# Altium PCB Synthesizer Build part-24 ADSR with 7555_TC_V1.PcbDoc
Units mm, origin at the board's own origin, x right, y up, seen from the top; angles counter-clockwise.
Board outline 118.36 x 72.39 mm, 2 copper layers (Top Layer, Bottom Layer), stack 1.681 mm thick; 56 components, 40 nets, 160 pads, 7 vias.
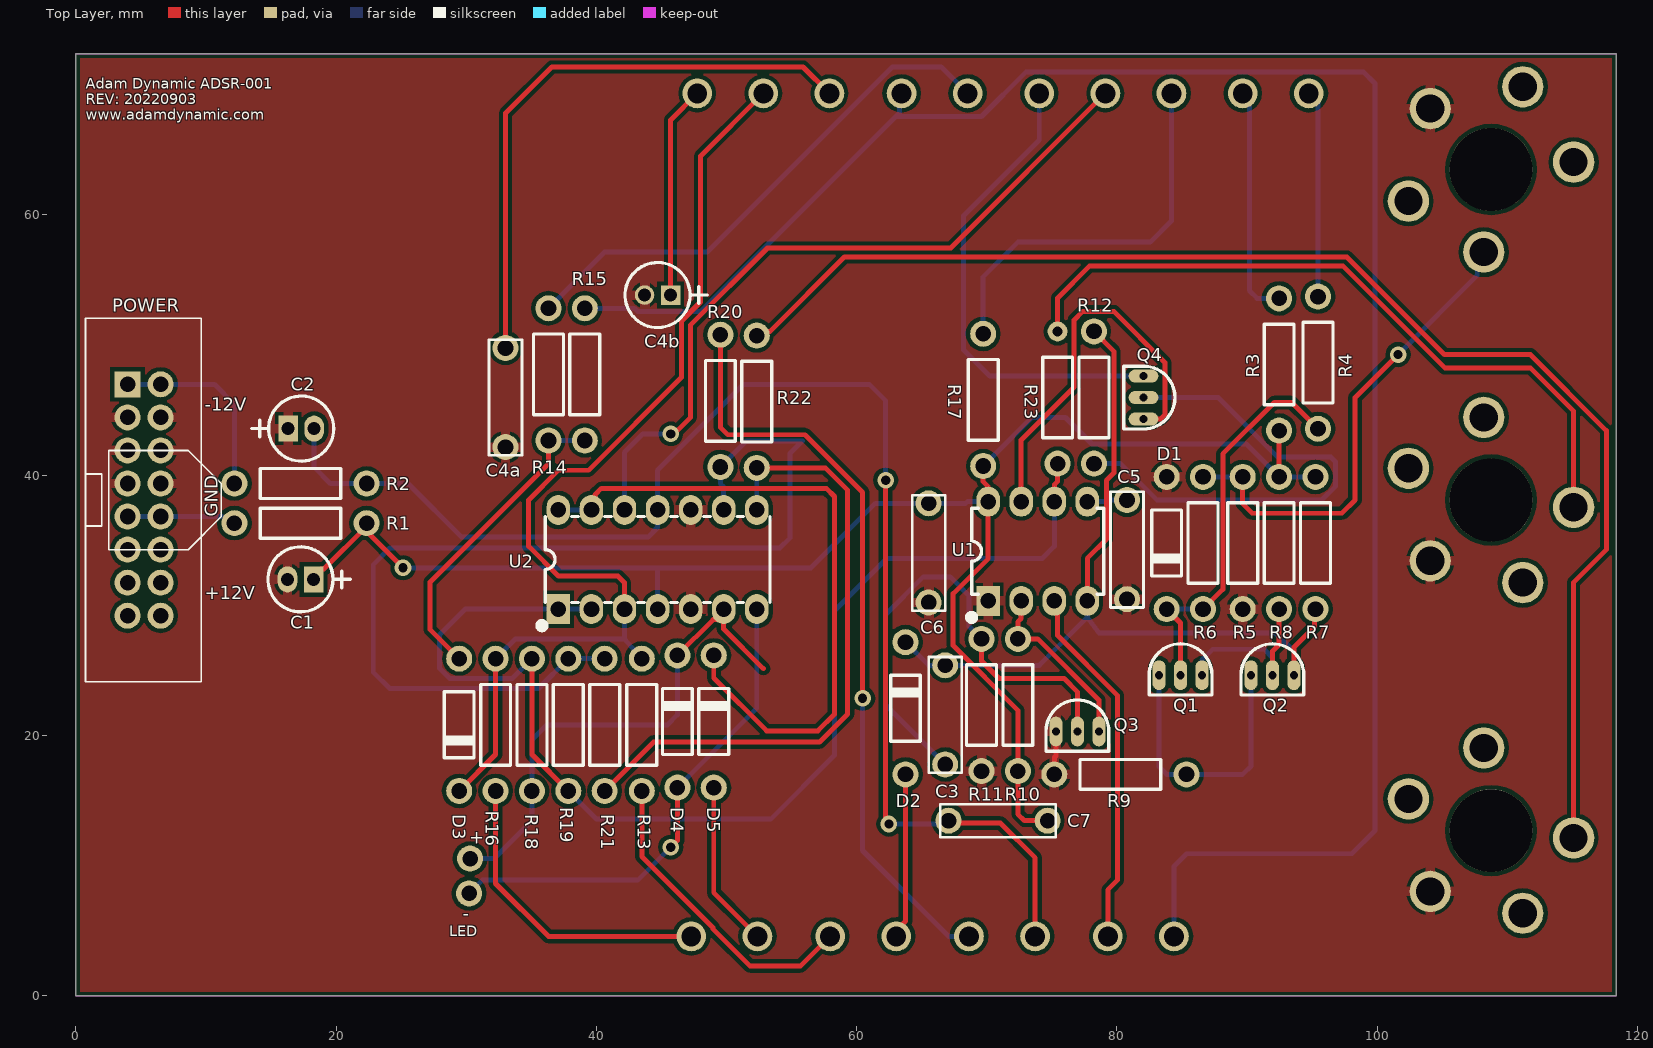
[diagram p0: Top Layer view]
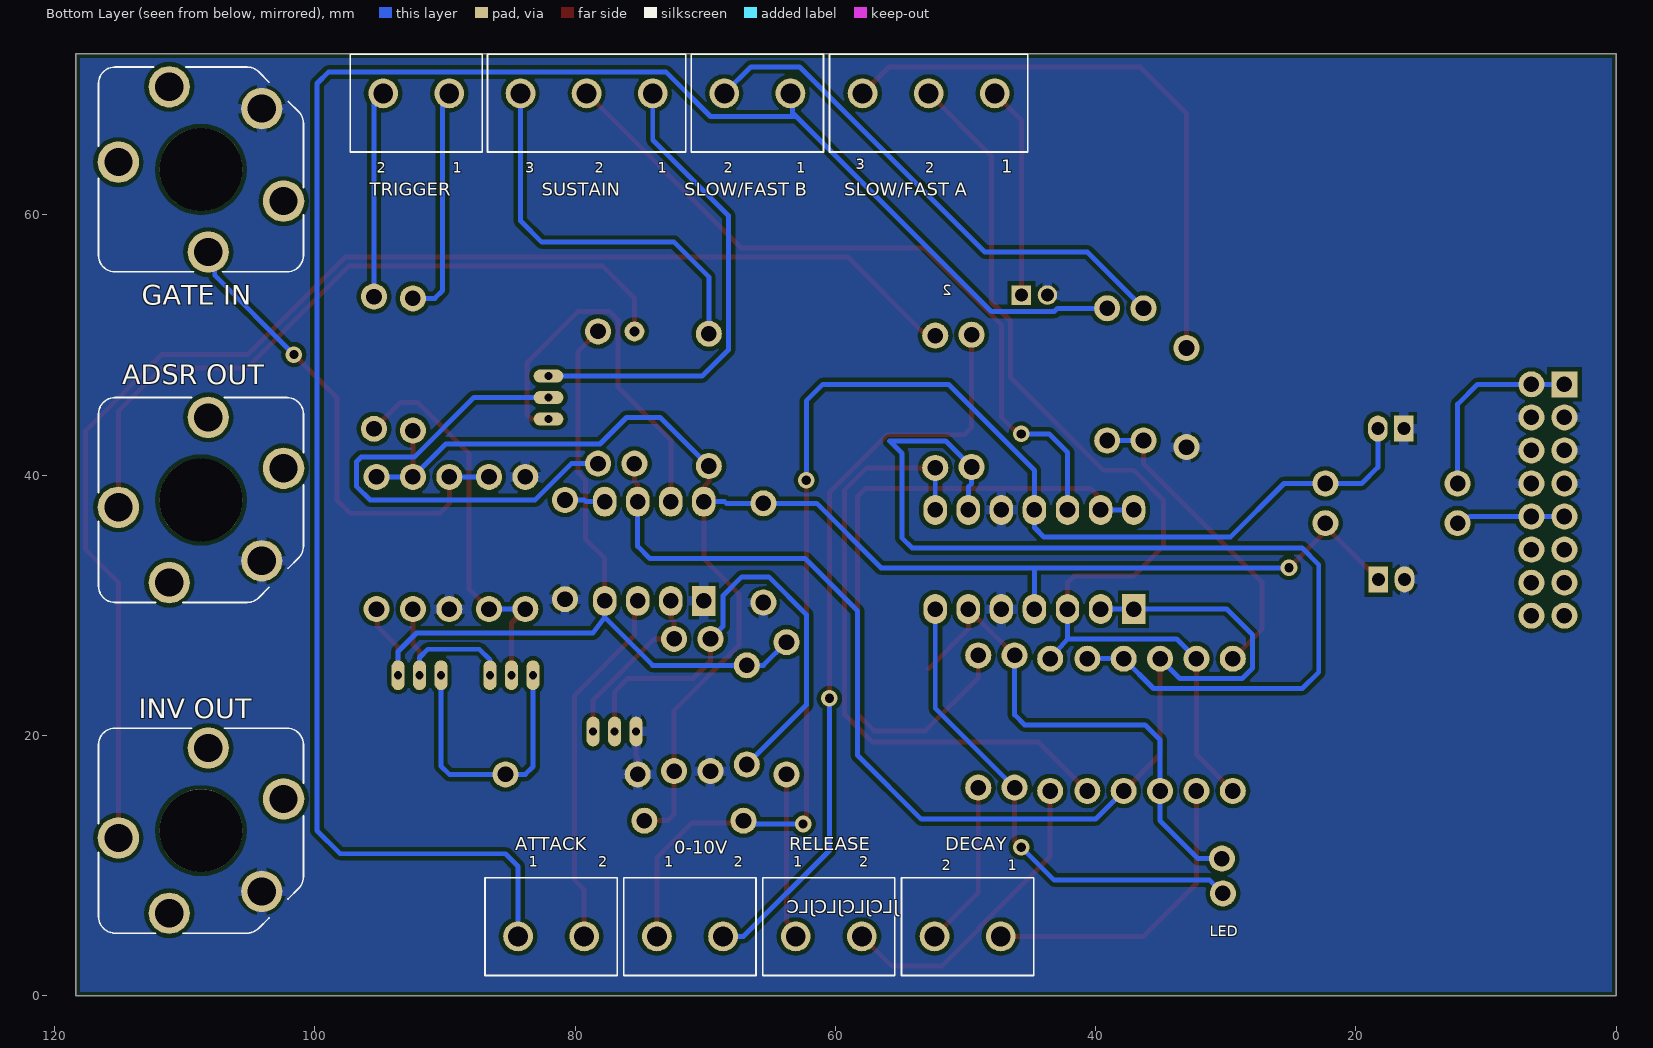
[diagram p1: Bottom Layer view, seen from below]
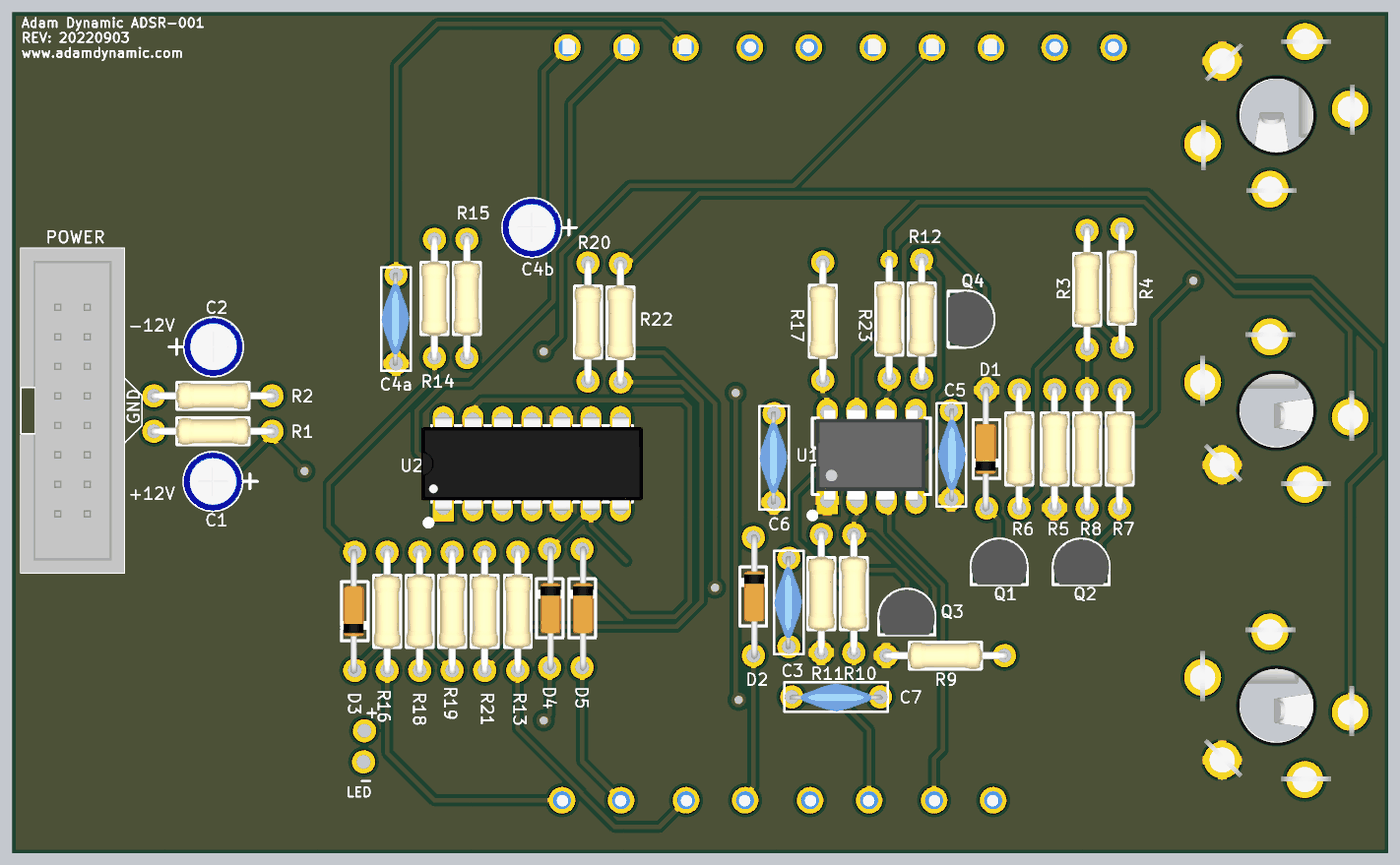
[diagram p2: 3D render of the assembled board from above, using the file's embedded part models]
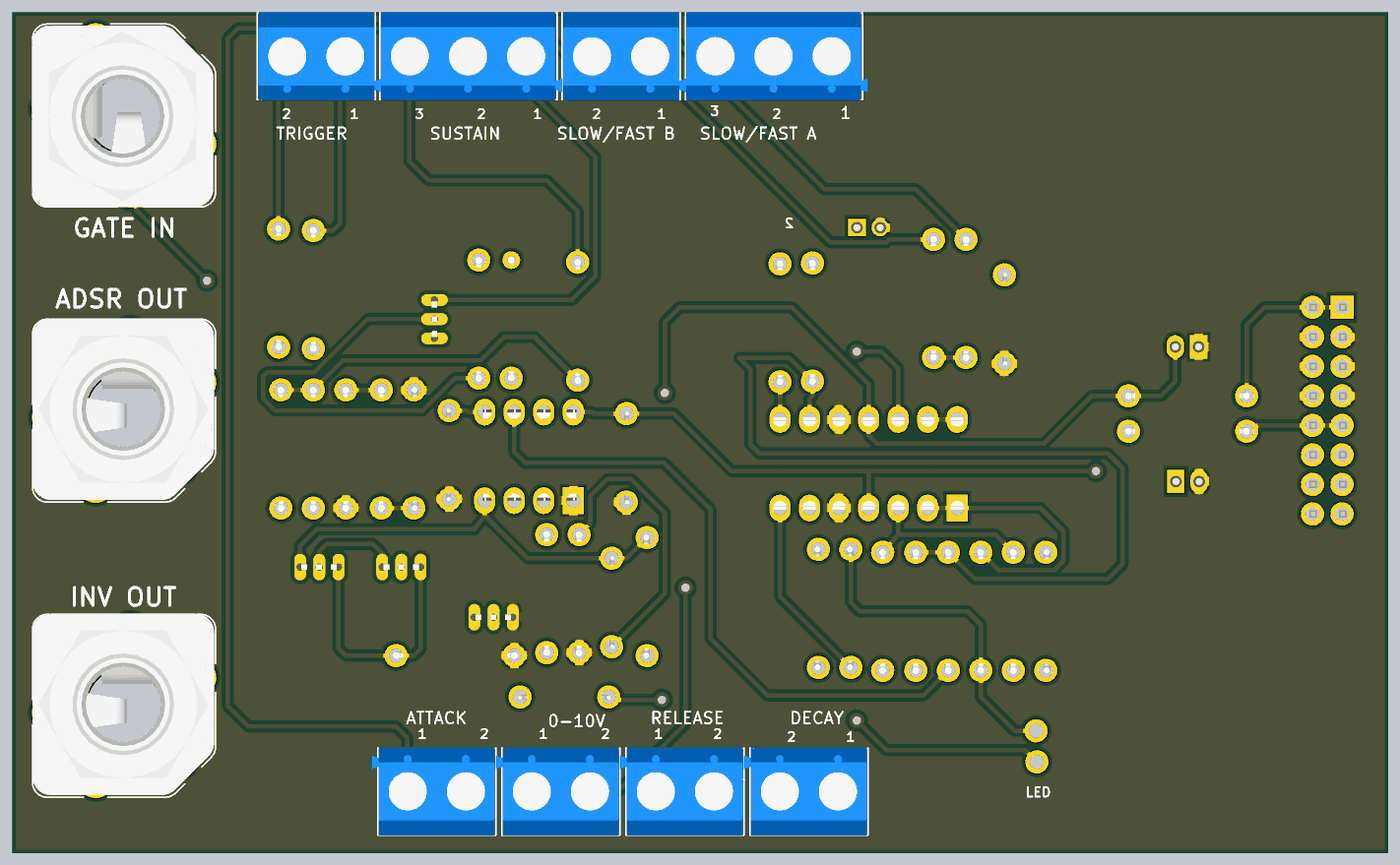
[diagram p3: 3D render of the assembled board from below, using the file's embedded part models]

## Layer stack, top to bottom
Top Solder: solder mask 0.0102, Solder Resist, Dk 3.5
Top Layer: signal copper 0.0356
Dielectric1: dielectric 1.6104, FR-4, Dk 4.8
Bottom Layer: signal copper 0.0356
Bottom Solder: solder mask 0.0102, Solder Resist, Dk 3.5

## Board outline
0,0 118.364,0 118.364,72.39 0,72.39

## Design rules (kind name [scope] priority, off if disabled: settings)
Clearance Clearance_1 [InPadClass('mount') vs InNamedPolygon('GND_L02_P002')or InNamedPolygon('GND_L01_P000')] p1: gap=1.27 ignorepadtopadclearanceinfootprint=FALSE except(0: Arc-Hole Track-Hole SMDPad-Hole THPad-Hole Via-Hole Fill-Hole Poly-Hole Region-Hole Text-Hole)
Clearance [All] p2: gap=0.318 ignorepadtopadclearanceinfootprint=FALSE except(0: Arc-Hole Track-Hole SMDPad-Hole THPad-Hole Via-Hole Fill-Hole Poly-Hole Region-Hole Text-Hole)
PolygonConnect PolygonConnect_1 [HasFootprint('HEADER 8X2')] p1: connectstyle=Relief reliefconductorwidth=0.762 reliefentries=4 polygonreliefangle="90 Angle" airgapwidth=0.254
PolygonConnect [All] p2: connectstyle=Relief reliefconductorwidth=0.762 reliefentries=4 polygonreliefangle="90 Angle" airgapwidth=0.254
RoutingVias [All] p1: holewidth=0.711 width=1.27 viastyle="Through Hole" minholewidth=0.711 minwidth=1.27 maxholewidth=0.711 maxwidth=1.27
SolderMaskExpansion [All] p1: expansion=0.102
Width [All] p1: maxlimit=1.27 minlimit=0.254 preferedwidth=0.381
30 further rules are at their usual default settings.

## Components (designator, comment, footprint, x,y, rotation, side; value= is the part's Value field where it differs from the comment)
0-10V "SCREW TERMINAL 2WAY" "SCREW TERMINAL 2WAY" 71.172,4.572 r180 bottom
+ "Hole" LED_HOle 30.3,10.55 r0 top
- "Hole" LED_HOle 30.226,7.874 r0 top
"ADSR OUT" "N114BPCX" SWITCHCRAFT_N114BPCX 108.74,38.1 r180 bottom locked
ATTACK "SCREW TERMINAL 2WAY" "SCREW TERMINAL 2WAY" 81.84,4.572 r180 bottom
C1 "22uF" "CAP 5X11"#1 17.272,32.004 r180 top
C2 "22uF" "CAP 5X11"#1 17.321,43.588 r0 top
C3 "10nF" "CAP RAD-0.3" 66.802,21.59 r270 top
C4a "1uF" "CAP RAD-0.3" 33.02,45.974 r270 top
C4b "10uF" "CAP 5X11"#2 44.704,53.848 r180 top
C5 "10nF" "CAP RAD-0.3" 80.772,34.29 r90 top
C6 "100nF" "CAP RAD-0.3" 65.532,34.036 r270 top
C7 "100nF" "CAP RAD-0.3" 70.866,13.462 r0 top
D1 "DIODE 1N4148" DO-35 83.82,34.798 r270 top
D2 "DIODE 1N4148" DO-35 63.754,22.098 r90 top
D3 "DIODE 1N4148" DO-35 29.464,20.828 r270 top
D4 "DIODE 1N4148" DO-35 49.022,21.082 r90 top
D5 "DIODE 1N4148" DO-35 46.228,21.082 r90 top
DECAY "SCREW TERMINAL 2WAY" "SCREW TERMINAL 2WAY" 49.836,4.572 r180 bottom
"GATE IN" "N114BPCX" SWITCHCRAFT_N114BPCX 108.74,63.5 r90 bottom locked
"INV OUT" "N114BPCX" SWITCHCRAFT_N114BPCX 108.74,12.7 r180 bottom locked
POWER "HEADER 8X2" "HEADER 8X2" 5.254,38.1 r270 top locked
Q1 "BC547" TO92 84.884,24.641 r0 top
Q2 "BC547" TO92 91.948,24.638 r0 top
Q3 "BC547" TO92 76.962,20.32 r0 top
Q4 "BS170" TO92 82.042,45.974 r270 top
R1 "10R" "RES 6.2 x 0.5 x 2.3"#1 17.272,36.322 r180 top
R2 "10R" "RES 6.2 x 0.5 x 2.3"#1 17.272,39.37 r180 top
R3 "10K" "RES 6.2 x 0.5 x 2.3"#1 92.456,48.514 r270 top
R4 "47K" "RES 6.2 x 0.5 x 2.3"#1 95.446,48.651 r270 top
R5 "1M2" "RES 6.2 x 0.5 x 2.3"#1 89.662,34.798 r90 top
R6 "1M" "RES 6.2 x 0.5 x 2.3"#1 86.614,34.798 r90 top
R7 "22K" "RES 6.2 x 0.5 x 2.3"#1 92.456,34.798 r90 top
R8 "22K" "RES 6.2 x 0.5 x 2.3"#1 95.25,34.798 r90 top
R9 "10R" "RES 6.2 x 0.5 x 2.3"#1 80.264,17.018 r0 top
R10 "22K" "RES 6.2 x 0.5 x 2.3"#1 69.596,22.352 r90 top
R11 "22K" "RES 6.2 x 0.5 x 2.3"#1 72.39,22.352 r270 top
R12 "1M" "RES 6.2 x 0.5 x 2.3"#1 78.232,45.974 r90 top
R13 "100R" "RES 6.2 x 0.5 x 2.3"#1 43.493,20.828 r90 top
R14 "120R" "RES 6.2 x 0.5 x 2.3"#1 36.322,47.752 r90 top
R15 "680R" "RES 6.2 x 0.5 x 2.3"#1 39.116,47.752 r270 top
R16 "100R" "RES 6.2 x 0.5 x 2.3"#1 32.258,20.828 r90 top
R17 "4K7" "RES 6.2 x 0.5 x 2.3"#1 69.723,45.791 r90 top
R18 "1K" "RES 6.2 x 0.5 x 2.3"#1 35.052,20.828 r90 top
R19 "100K" "RES 6.2 x 0.5 x 2.3"#1 37.846,20.828 r90 top
R20 "150K" "RES 6.2 x 0.5 x 2.3"#1 49.53,45.72 r90 top
R21 "100K" "RES 6.2 x 0.5 x 2.3"#1 40.64,20.828 r90 top
R22 "1K" "RES 6.2 x 0.5 x 2.3"#1 52.324,45.652 r270 top
R23 "1K" "RES 6.2 x 0.5 x 2.3"#2 75.438,45.974 r270 top
RELEASE "SCREW TERMINAL 2WAY" "SCREW TERMINAL 2WAY" 60.504,4.572 r180 bottom
"SLOW/FAST A" "SCREW TERMINAL 3WAY" "SCREW TERMINAL 3WAY" 52.832,69.342 r0 bottom
"SLOW/FAST B" "SCREW TERMINAL 2WAY" "SCREW TERMINAL 2WAY" 65.988,69.342 r0 bottom
SUSTAIN "SCREW TERMINAL 3WAY" "SCREW TERMINAL 3WAY" 79.111,69.342 r0 bottom
TRIGGER "SCREW TERMINAL 2WAY" "SCREW TERMINAL 2WAY" 92.202,69.342 r0 bottom
U1 "ICM7555" "DIP 8 PIN" 73.914,34.163 r0 top
U2 "TL074" "DIP 14 PIN" 45.974,33.528 r0 top

## Footprints (in the part's own frame and the unit in brackets; to place one, negate y for a bottom-side part, rotate by r counter-clockwise, add the part's x,y. Pads: shape width x height; smd on the part's side, far side on the other; paste and mask are expansions set on the pad)
"CAP 5X11"#1 [mm]
  rect 1.5x2 hole 1: 1(-1,0)
  oval 1.5x2 hole 1: 2(1,0)
  silkscreen extent -3.81,-2.5 2.5,2.5, body extent -2.53,-2.53 2.53,2.53, height 11.53
"CAP 5X11"#2 [mm]
  rect 1.5x1.5 hole 1: 1(-1,0)
  round 1.5 hole 1: 2(1,0)
  silkscreen extent -3.81,-2.5 2.5,2.5, body extent -2.53,-2.53 2.53,2.53, height 11.53
"CAP RAD-0.3" [mm]
  round 2 hole 1.2: 1(-3.81,0) 2(3.81,0)
  silkscreen extent -4.44,-1.27 4.45,1.27, body extent -4,-1.25 4,1.14, height 11.03
"DIP 8 PIN" [mm]
  rect 1.8x2.3 hole 1.2: 1(-3.81,-3.81)
  oval 1.8x2.3 hole 1.2: 2(-1.27,-3.81) 3(1.27,-3.81) 4(3.81,-3.81) 5(3.81,3.81) 6(1.27,3.81) 7(-1.27,3.81) 8(-3.81,3.81)
  silkscreen extent -5.33,-5.33 5.08,3.3, body extent -4.76,-3.81 4.64,4.06, height 4.36
"DIP 14 PIN" [mm]
  rect 1.8x2.3 hole 1.2: 1(-8.89,-3.81)
  oval 1.8x2.3 hole 1.2: 2(-6.35,-3.81) 3(-3.81,-3.81) 4(-1.27,-3.81) 5(1.27,-3.81) 6(3.81,-3.81) 7(6.35,-3.81) 8(6.35,3.81) 9(3.81,3.81) 10(1.27,3.81) 11(-1.27,3.81) 12(-3.81,3.81) 13(-6.35,3.81) 14(-8.89,3.81)
  silkscreen extent -10.41,-5.33 7.37,3.3, body extent -10.77,-4 8.28,4, height 4.11
DO-35 [mm]
  round 2 hole 1.2: 1(-5.08,0) 2(5.08,0)
  silkscreen extent -2.54,-1.14 2.54,1.14, body extent -5.35,-0.95 5.35,0.8, height 2.15
"HEADER 8X2" [mm]
  rect 2x2 hole 1.2: 1(-8.89,-1.27)
  round 2 hole 1.2: 2(-8.89,1.27) 3(-6.35,-1.27) 4(-6.35,1.27) 5(-3.81,-1.27) 6(-3.81,1.27) 7(-1.27,-1.27) 8(-1.27,1.27) 9(1.27,-1.27) 10(1.27,1.27) 11(3.81,-1.27) 12(3.81,1.27) 13(6.35,-1.27) 14(6.35,1.27) 15(8.89,-1.27) 16(8.89,1.27)
  silkscreen extent -13.97,-4.5 13.97,4.39, body extent -13.97,-4.5 13.97,4.39, height 8.56
LED_HOle [mm]
  round 2 hole 1.2: 1(0,0)
"RES 6.2 x 0.5 x 2.3"#1 [mm]
  round 2 hole 1.2: 1(-5.08,0) 2(5.08,0)
  silkscreen extent -3.1,-1.15 3.1,1.15, body extent -5.4,-1.15 5.36,1.15, height 2.43
"RES 6.2 x 0.5 x 2.3"#2 [mm]
  round 1.524 hole 0.762: 1(-5.08,0)
  round 2 hole 1.2: 2(5.08,0)
  silkscreen extent -3.1,-1.15 3.1,1.15, body extent -5.4,-1.15 5.36,1.15, height 2.43
"SCREW TERMINAL 2WAY" [mil]
  round 90 hole 60: 1(-100,0) 2(100,0)
  silkscreen extent -200,-118 200,177, body extent -220,-120 197,180, height 394
"SCREW TERMINAL 3WAY" [mil] "SCREW TERMINAL 3WAY 5.08mm"
  round 90 hole 60: 1(-200,0) 2(0,0) 3(200,0)
  silkscreen extent -300,-118 300,177, body extent -317,-120 297,179, height 394
SWITCHCRAFT_N114BPCX [mil]
  round 125 hole 85: R(22,250) RS(250,96) SLV(183.8,-183.8) T(-250,-22) TS(-96,-250)
  round 250 hole 250 unplated: ""(0,0)
  silkscreen extent -310,-310 310,310, body extent -310,-303 305,312, height 1697
TO92 [mil]
  oval 40x90 hole 25 mask+0: 1(-65,0) 2(0,0) 3(65,0)
  silkscreen extent -95,-60 95,95, body extent -94,-60 95,94, height 315

## Part data
0-10V ATTACK DECAY RELEASE "SLOW/FAST B" TRIGGER: "SCREW TERMINAL 2WAY 5.08mm"
"ADSR OUT" "GATE IN" "INV OUT": "Conn 1/4'' Phone Jack F 3 POS Solder ST Thru-Hole 5 Terminal 1 Port", Package=None, Availability=Unavailable, MP=N114BPCX, Price=None
C1 C2 C3 C4a C4b C5 C6 C7: library part "Capacitor Polar"
D1 D2 D3 D4 D5: "Small Signal Fast Switching Diodes"
Q1 Q2 Q3: "NPN Epitaxial Silicon Transistor"
Q4: "Small Signal N Channel MOSFET"
R1 R2 R3 R4 R5 R6 R7 R8 R9 R10 R11 R12 R13 R14 R15 R16 R17 R18 R19 R20 R21 R22 R23: library part Res2, "Resistor", LatestRevisionDate=17-Jul-2002, LatestRevisionNote="Re-released for DXP Platform.", PackageReference=AXIAL-0.4, Published=8-Jun-2000, Publisher="Altium Limited"
"SLOW/FAST A" SUSTAIN: "SCREW TERMINAL 3WAY 5.08mm"
U1: "General purpose CMOS timer"
U2: "Low-Noise FET-Input Operational Amplifiers"

## Via types
v1: diameter 1.27, hole 0.711, Top Layer to Bottom Layer, tented both sides, 7 vias

## Nets (pads, with @x,y where several pads share a name; then routed paths per layer and width w, separated by ;. In a path a pad name is that pad's centre, name@x,y a point inside that pad or via, vN(x,y) a via of type N, cw(c..) or ccw(c..) an arc to the next point about the centre after c; other vN are vias at no path point)
+12V0: C1.1 C6.1 C7.2 R1.1 R3.2 R7.2 R8.2 R11.2 R17.1 U1.8 U2.4 | length 126.1
  Top Layer w0.381: C1.1 18.272,32.254 18.832,32.814 19.082,32.814 22.352,36.084 R1.1 22.662,36.012 22.662,35.377 v1(25.146,32.893) ; R17.1 69.723,39.514 70.104,39.133 U1.8 70.104,33.595 67.412,30.903 67.412,26.923 72.39,21.945 R11.2 72.39,13.97 72.898,13.462 C7.2 ; R7.2 R3.2
  Bottom Layer w0.381: v1(25.146,32.893) 31.75,32.893 44.704,32.893 ; U2.4 44.704,32.893 ; R17.1 73.454,44.441 76.048,44.441 78.08,42.409 89.925,42.409 R7.2 R8.2 ; U1.8 68.504,37.973 68.377,37.846 C6.1 61.442,37.846 56.489,32.893 44.704,32.893
-12V0: 0-10V.1 C2.2 C7.1 R2.1 U2.11 | length 108.3
  Top Layer w0.381: v1(62.23,39.624) 62.23,13.462 v1(62.484,13.208) ; C7.1 67.232,13.286 71.042,13.286 73.712,10.616 0-10V.1
  Bottom Layer w0.381: C2.2 18.321,40.607 19.558,39.37 R2.1 25.527,39.37 29.651,35.246 43.967,35.246 44.704,35.983 U2.11 44.704,40.386 51.308,46.99 60.96,46.99 62.23,45.72 v1(62.23,39.624) ; v1(62.484,13.208) 66.802,13.208 C7.1
GND: "ADSR OUT.SLV" "GATE IN.SLV" "INV OUT.SLV" C1.2 C2.1 C4a.2 C4b.2 C5.1 C6.2 D1.1 POWER.3 POWER.4 POWER.5 POWER.6 POWER.7 POWER.8 Q3.1 R5.1 R9.1 R10.1 U1.1 U2.5 U2.10 | length 3.9
  Top Layer w0.381: R9.1@75.184,16.51 75.184,18.33 75.311,18.457 Q3.1
Net0-10V_2: 0-10V.2 R20.2 | length 58.5
  Top Layer w0.381: R20.2 49.53,43.688 50.102,43.116 56.034,43.116 60.452,38.698 v1(60.452,22.86)
  Bottom Layer w0.381: v1(60.452,22.86) 60.452,11.176 67.056,4.572 0-10V.2
Net+_1: +.1 D5.2 R18.1 U2.6 | length 39.2
  Top Layer w0.381: D5.2 48.971,28.905 U2.6@49.784,28.905 ; U2.6 U2.6@49.784,28.905 ; 52.832,25.146 49.784,28.194 U2.6@49.784,28.905
  Bottom Layer w0.381: +.1 32.14,10.55 35.052,13.462 R18.1 35.052,19.678 36.193,20.819 45.457,20.819 46.228,21.59 D5.2
Net-_1: -.1 D5.1 U2.7 | length 38
  Top Layer w0.381: v1(45.72,11.43) 46.228,11.938 D5.1
  Bottom Layer w0.381: -.1 31.242,8.89 43.18,8.89 v1(45.72,11.43) ; D5.1 52.324,22.098 U2.7
"NetADSR OUT_T": "ADSR OUT.T" R23.1 | length 55.2
  Top Layer w0.381: R23.1 75.438,53.625 77.884,56.071 97.374,56.071 105.184,48.26 111.76,48.26 115.09,44.93 115.09,37.541
NetATTACK_1: "SLOW/FAST B.1" ATTACK.1 R15.1 | length 150.1
  Bottom Layer w0.381: R15.1 42.941,52.832 43.183,52.59 48.018,52.59 62.992,67.564 ; 63.448,69.342 63.279,69.172 63.279,67.851 62.992,67.564 ; ATTACK.1 84.38,9.958 85.344,10.922 98.044,10.922 99.822,12.7 99.822,70.104 98.933,70.993 73.025,70.993 69.596,67.564 62.992,67.564
NetATTACK_2: ATTACK.2 U1.3 | length 28.1
  Top Layer w0.381: U1.3 75.438,30.099 75.438,27.686 80.036,23.088 80.036,8.89 79.3,8.154 ATTACK.2
NetC3_1: C3.1 D2.2 Q2.3 R8.1 R12.2 U1.4 | length 64.3
  Top Layer w0.381: U1.4 77.724,33.621 79.197,35.094 79.197,39.615 79.756,40.174 79.756,49.53 R12.2 ; Q2.3 93.599,26.797 95.172,28.37 95.172,29.64 R8.1
  Bottom Layer w0.381: D2.2 65.532,25.4 C3.1 74.041,25.4 77.724,29.083 ; U1.4 77.724,29.083 ; Q2.3 93.599,26.458 92.177,27.88 78.613,27.88 77.724,29.083
NetC3_2: C3.2 Q3.2 R10.2 | length 38.4
  Top Layer w0.381: R10.2 69.596,25.727 70.938,24.384 75.946,24.384 76.962,23.368 Q3.2
  Bottom Layer w0.381: C3.2 62.23,22.352 62.23,29.303 65.126,32.198 67.183,32.198 68.631,30.751 68.631,28.397 R10.2
NetC4a_1: "SLOW/FAST A.3" C4a.1 | length 45.2
  Top Layer w0.381: C4a.1 33.02,67.818 36.576,71.374 55.88,71.374 57.912,69.342
NetC4b_1: "SLOW/FAST A.1" C4b.1 | length 16.3
  Top Layer w0.381: C4b.1 45.704,67.294 47.752,69.342
NetC5_2: C5.2 U1.5 | length 3.1
  Bottom Layer w0.381: U1.5 79.172,37.973 79.299,38.1 C5.2
NetD1_2: D1.2 Q1.2 R4.2 R6.1 | length 30.7
  Top Layer w0.381: D1.2 84.884,28.654 Q1.2 ; R6.1 88.138,31.242 88.138,41.647 92.1,45.61 93.407,45.61 R4.2
  Bottom Layer w0.381: D1.2 R6.1
NetD2_1: D2.1 RELEASE.1 | length 12.7
  Top Layer w0.381: RELEASE.1 63.044,5.037 63.754,5.748 D2.1
NetD3_1: D3.1 R14.1 R15.2 | length 24.4
  Top Layer w0.381: D3.1 27.229,28.143 27.229,31.801 36.322,40.894 R14.1
  Bottom Layer w0.381: R14.1 R15.2 R15.2@39.243,42.672
NetD3_2: "SLOW/FAST A.2" D3.2 R13.2 R16.2 U2.3 | length 80.3
  Top Layer w0.381: D3.2 32.258,18.542 R16.2 ; U2.3 42.164,31.75 41.656,32.258 37.084,32.258 34.798,34.544 34.798,38.1 37.084,40.386 39.407,40.386 46.545,47.524 46.545,51.851 48.006,53.312 48.006,64.516 52.832,69.342
  Bottom Layer w0.381: R16.2 33.773,27.423 42.164,27.423 ; U2.3 42.164,27.423 ; R13.2 42.164,27.423
NetD4_1: D4.1 DECAY.1 | length 12.8
  Top Layer w0.381: D4.1 49.022,7.926 DECAY.1
NetD4_2: D4.2 U2.13 U2.14 | length 52.6
  Top Layer w0.381: U2.13 39.896,37.61 39.896,38.506 40.386,38.996 57.668,38.996 58.293,38.371 58.293,21.632 57.023,20.362 53.086,20.362 49.022,24.426 D4.2
  Bottom Layer w0.381: U2.14 U2.13
NetDECAY_2: DECAY.2 R16.1 | length 23.8
  Top Layer w0.381: R16.1 32.258,8.636 36.322,4.572 DECAY.2
"NetGATE IN_T": "GATE IN.T" R5.2 R6.2 | length 37.6
  Top Layer w0.381: R5.2 89.662,37.815 90.393,37.084 97.282,37.084 98.298,38.1 98.298,45.974 v1(101.6,49.276)
  Bottom Layer w0.381: R6.2 R5.2 ; v1(101.6,49.276) 107.682,55.358 107.682,56.651 108.181,57.15
"NetINV OUT_T": "INV OUT.T" R22.1 | length 105.6
  Top Layer w0.381: R22.1 52.634,51.042 53.328,51.042 59.055,56.769 97.663,56.769 105.156,49.276 111.76,49.276 117.602,43.434 117.602,34.29 115.09,31.778 115.09,12.141
NetPOWER_1: POWER.1 POWER.2 R2.2 | length 14.9
  Bottom Layer w0.381: POWER.1 POWER.2 10.668,46.99 12.192,45.466 R2.2
NetPOWER_9: POWER.9 POWER.10 R1.2 | length 8.4
  Bottom Layer w0.381: POWER.9 POWER.10 11.246,36.83 11.754,36.322 R1.2
NetQ1_1: Q1.1 Q2.1 R9.2 | length 21.6
  Bottom Layer w0.381: Q1.1 83.233,17.605 83.82,17.018 R9.2 89.662,17.018 90.297,17.653 Q2.1
NetQ1_3: Q1.3 Q2.2 R7.1 | length 13.8
  Top Layer w0.381: Q2.2 91.948,26.489 92.456,26.997 R7.1
  Bottom Layer w0.381: Q1.3 86.535,25.823 87.347,26.636 91.313,26.636 91.948,26.001 Q2.2
NetQ3_3: Q3.3 R11.1 U1.2 | length 13.6
  Top Layer w0.381: U1.2 72.644,28.998 72.39,28.744 R11.1 73.914,27.432 78.613,22.733 Q3.3
NetQ4_1: Q4.1 SUSTAIN.1 | length 36.8
  Bottom Layer w0.381: SUSTAIN.1 74.031,65.76 68.215,59.944 68.215,49.641 70.231,47.625 Q4.1
NetQ4_2: Q4.2 R12.1 | length 38.8
  Bottom Layer w0.381: R12.1 80.281,40.894 83.058,38.117 95.758,38.117 96.774,39.133 96.774,41.063 96.444,41.393 92.364,41.393 87.783,45.974 Q4.2
NetQ4_3: Q4.3 U1.7 | length 30.3
  Top Layer w0.381: U1.7 72.644,42.714 76.708,46.778 76.708,51.934 77.343,52.569 79.781,52.569 83.693,48.658 83.693,44.64 83.376,44.323 Q4.3
NetR3_1: R3.1 TRIGGER.1 | length 17.8
  Bottom Layer w0.381: TRIGGER.1@89.916,69.342 90.17,69.088 90.17,54.196 90.772,53.594 R3.1
NetR4_1: R4.1 TRIGGER.2 | length 16.1
  Bottom Layer w0.381: TRIGGER.2@94.996,69.342 95.446,68.892 R4.1 R4.1@95.25,53.926
NetR13_1: R13.1 RELEASE.2 | length 24
  Top Layer w0.381: R13.1 43.493,10.71 48.947,5.256 48.947,5.155 51.816,2.286 55.678,2.286 RELEASE.2
NetR14_2: "SLOW/FAST B.2" R14.2 | length 40.7
  Bottom Layer w0.381: R14.2 40.64,57.15 48.514,57.15 62.738,71.374 66.496,71.374 68.528,69.342
NetR17_2: R17.2 SUSTAIN.3 | length 30.4
  Bottom Layer w0.381: R17.2 69.723,55.245 72.39,57.912 82.55,57.912 84.191,59.553 SUSTAIN.3
NetR18_2: R18.2 R19.1 R23.2 U1.6 U2.1 U2.2 | length 94.4
  Top Layer w0.381: R18.2 35.052,18.542 R19.1 ; U1.6 75.184,39.285 75.438,39.539 R23.2
  Bottom Layer w0.381: R18.2 33.519,24.375 28.753,24.375 27.94,25.188 27.94,27.728 29.947,29.735 37.084,29.735 U2.1 U2.2 ; R19.1 40.014,13.58 53.391,13.58 58.293,18.482 58.293,29.591 62.297,33.595 74.235,33.595 75.184,34.544 U1.6
NetR19_2: R19.2 R20.1 R21.2 U2.9 | length 78.8
  Bottom Layer w0.381: R21.2 R19.2 35.551,23.613 24.121,23.613 22.86,24.874 22.86,33.138 24.13,34.408 54.102,34.408 54.864,35.17 54.864,41.673 55.829,42.638 51.528,42.638 R20.1 49.53,39.361 49.784,39.107 U2.9
NetR21_1: R21.1 R22.2 U2.8 | length 49.2
  Top Layer w0.381: R21.1 44.39,19.498 57.147,19.498 59.309,21.66 59.309,38.853 57.59,40.572 R22.2
  Bottom Layer w0.381: U2.8 R22.2
NetSUSTAIN_2: SUSTAIN.2 U2.12 | length 57
  Top Layer w0.381: v1(45.72,43.18) 45.974,43.18 47.244,44.45 47.244,51.562 53.15,57.468 67.236,57.468 SUSTAIN.2
  Bottom Layer w0.381: U2.12 42.164,41.762 43.582,43.18 v1(45.72,43.18)
pads on no net: "ADSR OUT." "ADSR OUT.R" "ADSR OUT.RS" "ADSR OUT.TS" "GATE IN." "GATE IN.R" "GATE IN.RS" "GATE IN.TS" "INV OUT." "INV OUT.R" "INV OUT.RS" "INV OUT.TS" POWER.11 POWER.12 POWER.13 POWER.14 POWER.15 POWER.16

## Polygon pours and split planes (outlines as drawn)
GND on Top Layer "GND_L01_P000" (solid, pour order 0): 0,72.39 118.364,72.39 118.364,0 0,0
GND on Bottom Layer "GND_L02_P002" (solid, pour order 2): 0,72.39 118.364,72.39 118.364,0 0,0

## Keep-outs
Keep-Out Layer:
  the board outline again, w0.013

## Other copper
Top Layer:
  text "TOP LAYER" at 157.734,-82.042 h1
Bottom Layer:
  text "BOTTOM LAYER" at 157.734,-82.042 h1

## Silkscreen, mask and mechanical layers (free items; w line width, h text height)
Top Overlay:
  lines w0.127: 2.54,34.29 2.54,41.91 6.858,41.91 8.636,41.91 11.176,39.37 11.176,36.83 8.636,34.29 2.54,34.29
  text "Adam Dynamic ADSR-001 / REV: 20220903 / www.adamdynamic.com" at 0.762,67.31 h0.8
  text "-12V" at 9.906,44.958 h1
  text "GND" at 10.922,36.83 h1 r90
  text "+12V" at 9.906,30.48 h1
  text "LED" at 28.702,4.572 h0.8
  text "TOP OVERLAY" at 157.734,-82.042 h1
Bottom Overlay:
  text "3" at 58.42,63.5 h0.8
  text "1" at 47.244,63.246 h1
  text "2" at 53.086,63.246 h0.8
  text "1" at 62.992,63.246 h0.8
  text "2" at 68.58,63.246 h0.8
  text "1" at 73.66,63.246 h0.8
  text "2" at 78.486,63.246 h0.8
  text "3" at 83.82,63.246 h0.8
  text "1" at 89.408,63.246 h0.8
  text "2" at 95.25,63.246 h0.8
  text "2" at 51.054,53.848 h0.8
  text "2" at 58.166,9.906 h0.8
  text "1" at 63.246,9.906 h0.8
  text "2" at 67.818,9.906 h0.8
  text "1" at 73.152,9.906 h0.8
  text "2" at 78.232,9.906 h0.8
  text "1" at 83.566,9.906 h0.8
  text "1" at 46.736,9.652 h0.8
  text "2" at 51.816,9.652 h0.8
  text "JLCJLCJLCJLC" at 55.118,6.35 h1
  text "LED" at 31.242,4.572 h0.8
Top Solder:
  text "TOP SOLDER" at 157.734,-82.042 h1
Bottom Solder:
  text "BOTTOM SOLDER" at 157.734,-82.042 h1
Mechanical 1:
  circle w0.013: c100,38.1 r1
  circle w0.013: c98.488,47.625 r3
  circle w0.013: c98.488,28.575 r3
  circle w0.013: c98.488,66.675 r2.65
  circle w0.013: c98.488,9.525 r3
  circle w0.013: c68.4,48.65 r1.5
  circle w0.013: c68.4,10.55 r1.5
  circle w0.013: c68.4,57.15 r3.5
  circle w0.013: c68.4,19.05 r3.5
  circle w0.013: c30.3,48.65 r1.5
  circle w0.013: c30.3,10.55 r1.5
  circle w0.013: c30.3,57.15 r3.5
  circle w0.013: c30.3,19.05 r3.5
  circle w0.013: c108.74,63.5 r5
  circle w0.013: c108.74,12.7 r5
  circle w0.013: c108.74,38.1 r5
  lines w0.013: 3.35,5.6 ccw(c4.95,5.6) 4.95,4 5.05,4 ccw(c5.05,5.6) 6.65,5.6 6.65,9.4 ccw(c5.05,9.4) 5.05,11 4.95,11 ccw(c4.95,9.4) 3.35,9.4 3.35,5.6 ; 3.35,66.56 ccw(c4.95,66.56) 4.95,64.96 5.05,64.96 ccw(c5.05,66.56) 6.65,66.56 6.65,70.36 ccw(c5.05,70.36) 5.05,71.96 4.95,71.96 ccw(c4.95,70.36) 3.35,70.36 3.35,66.56
FAB:
  text "FAB LAYER" at 157.734,-82.042 h1
Mechanical 16:
  lines w0.127: -65.981,-41.895 -60.901,-41.895 ; -65.981,6.365 -60.901,6.365 ; -65.981,54.625 -60.901,54.625 ; 7.044,-90.155 7.044,-85.075 ; 7.044,97.805 7.044,102.885 ; 80.069,-90.155 80.069,-85.075 ; 80.069,97.805 80.069,102.885 ; 106.739,-77.455 221.039,-77.455 ; 106.739,-69.835 221.039,-69.835 ; 106.739,-62.215 144.839,-62.215 ; 144.839,-85.075 144.839,-69.835 144.839,-54.595 ; 153.094,-90.155 153.094,-85.075 ; 198.179,-85.075 198.179,-69.835 ; 221.039,-41.895 226.119,-41.895 ; 221.039,54.625 226.119,54.625 ; 144.839,-54.595 106.739,-54.595 106.739,-85.075 221.039,-85.075 ; 144.839,-54.595 221.039,-54.595 221.039,-85.075 ; 221.039,-85.075 -60.901,-85.075 -60.901,97.805 221.039,97.805 221.039,-85.075 ; -65.981,-90.155 226.119,-90.155 226.119,102.885 -65.981,102.885 -65.981,-90.155
  text "1" at -29.735,99.457 h1
  text "2" at 42.909,99.457 h1
  text "3" at 116.061,99.457 h1
  text "4" at 188.959,99.457 h1
  text "SCALE" at 184.987,91.942 h1
  text "A" at -64.076,76.444 h1
  text "A" at 222.944,76.444 h1
  text "B" at -64.076,28.387 h1
  text "B" at 222.944,28.387 h1
  text "C" at -64.076,-20.127 h1
  text "C" at 222.944,-20.127 h1
  text "ENGINEER:" at 108.009,-57.134 h1
  text "TITLE:" at 146.109,-57.134 h1
  text "AdamDynamic" at 116.967,-59.394 h1
  text "Synthesizer Build part-24" at 154.178,-61.68 h1
  text "PCB DESIGNER:" at 108.009,-64.627 h1
  text "ADSR with 7555" at 154.178,-65.49 h1
  text "D" at -64.076,-68.133 h1
  text "D" at 222.944,-68.133 h1
  text "AdamDynamic" at 116.967,-68.157 h1
  text "DATE:" at 108.009,-72.374 h1
  text "PART NO.:" at 146.109,-72.374 h1
  text "REV:" at 199.449,-72.374 h1
  text "1.0" at 212.467,-75.168 h1
  text ".PRINT_DATE" at 109.279,-75.422 h1
  text "FILE NAME:" at 108.009,-79.994 h1
  text "DWG NO:" at 146.109,-79.994 h1
  text "SCALE:" at 199.449,-79.994 h1
  text "N/A" at 209.927,-82.788 h1
  text ".PCB_FILE_NAME_NO_PATH" at 109.279,-83.042 h1
  text "1" at -29.735,-88.503 h1
  text "2" at 42.909,-88.503 h1
  text "3" at 116.061,-88.503 h1
  text "4" at 188.959,-88.503 h1

## Dimensions
0,0 to 118.364,0 on Mechanical 15
118.364,72.39 to 118.364,0 on Mechanical 15